# EAGLE board STorM32 NT mpu module v007-mpu6000-panelized (EAGLE 6.5.0)
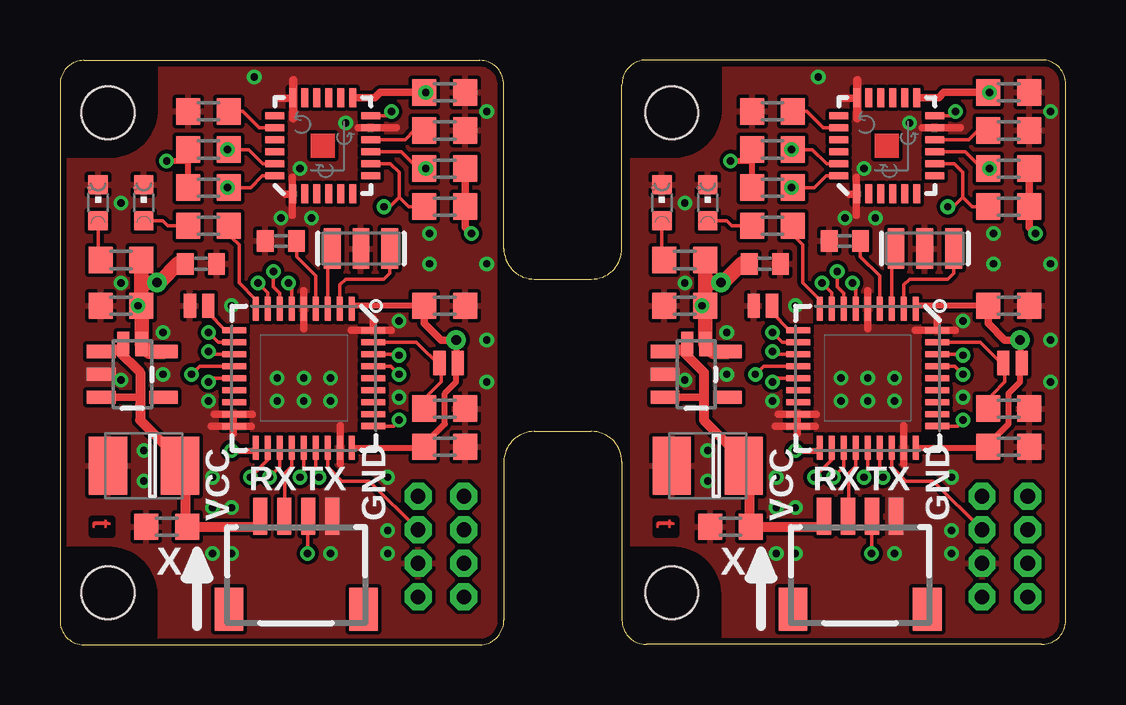
[diagram p0: board, top side]
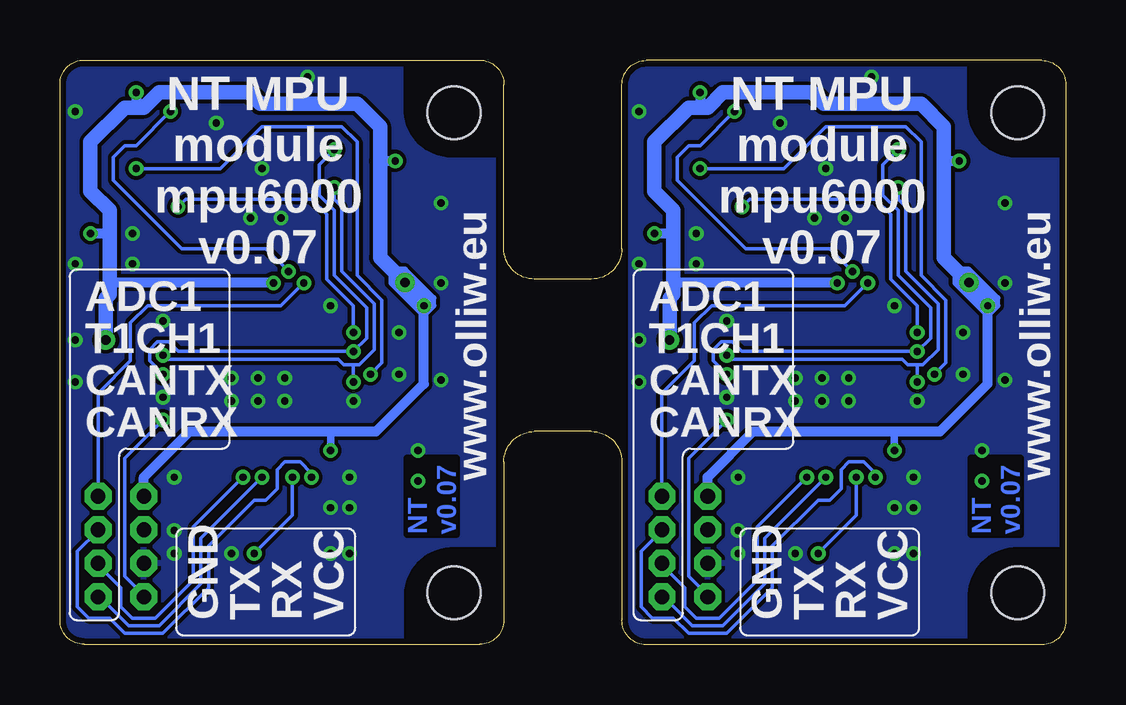
[diagram p1: board, bottom side, seen from below]

Size 41.91 x 24.37 mm. Coordinates in mm from the lower left corner, seen from the top.
Outline: 1,24.35 17.49,24.35 arc-90 18.49,23.34 18.49,16.51 arc90 19.76,15.24 22.15,15.24 arc90 23.42,16.51 23.42,23.34 arc-90 24.42,24.37 40.91,24.37 arc-90 41.91,23.37 41.91,1.02 arc-90 40.91,0.02 24.42,0.02 arc-90 23.42,1.03 23.42,7.62 arc90 22.15,8.89 19.76,8.89 arc90 18.49,7.62 18.49,1.03 arc-90 17.49,0 1,0 arc-90 0,1 0,23.35 arc-90 1,24.35
Copper layers (1*16): Top 0.035mm / dielectric 1.5mm / Bottom 0.035mm
Design rules "Fusion_eagle_rule_v1.1-shapes-supply-changed": minimum track width 6mil, minimum drill 12mil, track to track 6mil, track to pad 6mil, pad to pad 6mil, via to via 6mil, smd to smd 0mil, copper to edge 10mil, drill to drill 10mil, minimum pad ring 10mil, minimum via ring 6mil, stop-mask expansion 2mil, vias tented up to drill 100mil, thermal gap 6mil
Holes 2.2 mm at 2,2.18 2,22.18 25.5,2.18 25.5,22.18

## Footprints (pad centres in the part's own frame; a part is rotated, then mirrored left to right if it is on the bottom)
SMC_B = smd 1.6 x 2.4: + -1.5,0; - 1.5,0
C0603 = smd 1 x 1.1: 1 -0.85,0; 2 0.85,0
C0402 = smd 0.7 x 0.9: 1 -0.65,0; 2 0.65,0
QFN-24 = smd 0.8 x 0.3: 1 -2,1.25; 2 -2,0.75; 3 -2,0.25; 4 -2,-0.25; 5 -2,-0.75; 6 -2,-1.25; 13 2,-1.25; 14 2,-0.75; 15 2,-0.25; 16 2,0.25; 17 2,0.75; 18 2,1.25 | smd 0.3 x 0.8: 7 -1.25,-2; 8 -0.75,-2; 9 -0.25,-2; 10 0.25,-2; 11 0.75,-2; 12 1.25,-2; 19 1.25,2; 20 0.75,2; 21 0.25,2; 22 -0.25,2; 23 -0.75,2; 24 -1.25,2
SOT23-5 = smd 0.55 x 1.2: 1 -0.95,-1.3; 2 0,-1.3; 3 0.95,-1.3; 4 0.95,1.3; 5 -0.95,1.3
4X1_1P27_OCT_BILEX = drill 0.61 pad 1.118 octagon: 1 0,0; 2 0,-1.397; 3 0,-2.794; 4 0,-4.191
CHIPLED_0603 = smd 0.8 x 0.8: A 0,-0.75; C 0,0.75
SM04B-SRSS-TB = smd 0.6 x 1.55: 1 -1.5,2.975; 2 -0.5,2.975; 3 0.5,2.975; 4 1.5,2.975 | smd 1.2 x 1.8: FIT@1 -2.8,-0.9; FIT@2 2.8,-0.9
R0603 = smd 1 x 1.1: 1 -0.85,0; 2 0.85,0
SJ_2S-NO = smd 0.508 x 1.016: 1 -0.381,0; 2 0.381,0
VFQFPN36 = smd 1 x 0.25: 1 -2.9,2; 2 -2.9,1.5; 3 -2.9,1; 4 -2.9,0.5; 5 -2.9,0; 6 -2.9,-0.5; 7 -2.9,-1; 8 -2.9,-1.5; 9 -2.9,-2; 19 2.9,-2; 20 2.9,-1.5; 21 2.9,-1; 22 2.9,-0.5; 23 2.9,0; 24 2.9,0.5; 25 2.9,1; 26 2.9,1.5; 27 2.9,2 | smd 0.25 x 1: 10 -2,-2.9; 11 -1.5,-2.9; 12 -1,-2.9; 13 -0.5,-2.9; 14 0,-2.9; 15 0.5,-2.9; 16 1,-2.9; 17 1.5,-2.9; 18 2,-2.9; 29 1.5,2.9; 30 1,2.9; 31 0.5,2.9; 32 0,2.9; 33 -0.5,2.9; 34 -1,2.9; 35 -1.5,2.9; 36 -2,2.9 | smd 0.27 x 1: 28 2,2.9
RESONATOR-SMD = smd 0.7 x 1.7: 1 -1.2,0; 2 0,0; 3 1.2,0

## Placement (x,y rotation side)
C1  10u/6.3V  [SMC_B]  3.49,7.46 180 top
C2  100n  [C0603]  4.45,4.92 180 top
C3  100n  [C0603]  16.03,23.02 0 top
C4  10u/6.3V  [SMC_B]  26.99,7.46 180 top
C5  2.2n  [C0603]  6.19,22.22 180 top
C6  100n  [C0603]  16.03,21.43 0 top
C7  1u  [C0603]  2.54,14.13 180 top
C8  100n  [C0402]  9.21,16.83 180 top
C9  100n  [C0603]  16.03,8.25 0 top
C10  100n  [C0402]  5.87,15.88 0 top
C11  100n  [C0603]  16.03,14.13 0 top
C12  100n  [C0603]  39.53,21.43 0 top
C13  2.2n  [C0603]  29.69,22.22 180 top
C14  100n  [C0603]  39.53,23.02 0 top
C15  100n  [C0603]  27.94,4.92 180 top
C16  1u  [C0603]  26.04,14.13 180 top
C17  100n  [C0402]  32.7,16.83 180 top
C18  100n  [C0603]  39.53,8.25 0 top
C19  100n  [C0402]  29.37,15.88 0 top
C20  100n  [C0603]  39.53,14.13 0 top
IC1  MPU6000  [QFN-24]  10.95,20.8 90 top
IC2  [SOT23-5]  3.02,11.27 270 top
IC3  MPU6000  [QFN-24]  34.45,20.8 90 top
IC4  [SOT23-5]  26.51,11.27 270 top
JP1  EXT  [4X1_1P27_OCT_BILEX]  16.83,6.19 0 top
JP2  SWD  [4X1_1P27_OCT_BILEX]  14.92,6.19 0 top
JP3  EXT  [4X1_1P27_OCT_BILEX]  40.32,6.19 0 top
JP4  SWD  [4X1_1P27_OCT_BILEX]  38.42,6.19 0 top
LED1  red  [CHIPLED_0603]  1.59,18.41 0 top
LED2  green  [CHIPLED_0603]  3.49,18.41 0 top
LED3  red  [CHIPLED_0603]  25.08,18.41 0 top
LED4  green  [CHIPLED_0603]  26.99,18.41 0 top
NTX  NTX  [SM04B-SRSS-TB]  9.84,2.38 0 top
NTX1  NTX  [SM04B-SRSS-TB]  33.34,2.38 0 top
R1  2.2k  [R0603]  2.54,16.03 180 top
R2  2.2k  [R0603]  6.19,20.64 180 top
R3  2.2k  [R0603]  6.19,19.05 180 top
R4  10k  [R0603]  16.03,19.84 0 top
R5  10k  [R0603]  16.03,18.26 0 top
R6  2.2k  [R0603]  6.19,17.46 180 top
R7  10k  [R0603]  16.03,9.84 180 top
R8  2.2k  [R0603]  29.69,20.64 180 top
R9  2.2k  [R0603]  29.69,19.05 180 top
R10  2.2k  [R0603]  26.04,16.03 180 top
R11  10k  [R0603]  39.53,19.84 0 top
R12  10k  [R0603]  39.53,18.26 0 top
R13  10k  [R0603]  39.53,9.84 180 top
R14  2.2k  [R0603]  29.69,17.46 180 top
SJ1  POWER  [SJ_2S-NO]  3.02,12.54 0 top
SJ2  BOOT0  [SJ_2S-NO]  16.19,11.75 180 top
SJ3  IMU-ID  [SJ_2S-NO]  5.79,14.13 0 top
SJ4  POWER  [SJ_2S-NO]  26.51,12.54 0 top
SJ5  BOOT0  [SJ_2S-NO]  39.69,11.75 180 top
SJ6  IMU-ID  [SJ_2S-NO]  29.29,14.13 0 top
U1  STM32F10XTXU6  [VFQFPN36]  10.16,11.11 270 top
U2  STM32F10XTXU6  [VFQFPN36]  33.66,11.11 270 top
Y1  RESONATORSMD  [RESONATOR-SMD]  12.54,16.51 180 top
Y2  RESONATORSMD  [RESONATOR-SMD]  36.04,16.51 180 top

## Library data of the parts
C1-C20 R1-R14 = rcl
IC1-IC4 SJ1-SJ6 Y1 Y2 = # SparkFun2
JP1-JP4 = # stdlib
LED1-LED4 = led
NTX NTX1 = con-jst2
U1 U2 = # stm32

## Nets
3.3V: C3.1 C7.1 C9.1 C10.1 C11.1 IC1.13 IC2.5 JP2.1 R1.1 R2.2 R3.2 R4.2 R5.2 SJ1.2 SJ2.1 U1.1 U1.6 U1.19 U1.27
3.3V1: C14.1 C16.1 C18.1 C19.1 C20.1 IC3.13 IC4.5 JP4.1 R8.2 R9.2 R10.1 R11.2 R12.2 SJ4.2 SJ5.1 U2.1 U2.6 U2.19 U2.27
5V2: C1.+ C2.1 IC2.1 IC2.3 NTX.1 SJ1.1
5V3: C4.+ C15.1 IC4.1 IC4.3 NTX1.1 SJ4.1
ADC3: JP1.1 U1.8
ADC4: JP3.1 U2.8
CANRX2: JP1.4 U1.23
CANRX3: JP3.4 U2.23
CANTX2: JP1.3 U1.24
CANTX3: JP3.3 U2.24
CS2: IC1.8 R5.1 U1.11
CS3: IC3.8 R12.1 U2.11
GND: C1.- C2.2 C3.2 C5.2 C6.2 C7.2 C8.2 C9.2 C10.2 C11.2 IC1.1 IC1.11 IC1.18 IC2.2 JP2.3 LED1.C LED2.C NTX.4 R7.1 SJ3.1 U1.5 U1.17 U1.18 U1.26 U1.36 Y1.2
GND5: C4.- C12.2 C13.2 C14.2 C15.2 C16.2 C17.2 C18.2 C19.2 C20.2 IC3.1 IC3.11 IC3.18 IC4.2 JP4.3 LED3.C LED4.C NTX1.4 R13.1 SJ6.1 U2.5 U2.17 U2.18 U2.26 U2.36 Y2.2
INT2: IC1.12 U1.7
INT3: IC3.12 U2.7
LED2: R6.1 U1.9
LED3: R14.1 U2.9
N$15: LED1.A R1.2
N$16: C6.1 IC1.10
N$17: C5.1 IC1.20
N$18: C8.1 U1.4
N$19: R7.2 SJ2.2 U1.35
N$21: LED2.A R6.2
N$22: U1.2 Y1.1
N$23: U1.3 Y1.3
N$25: LED3.A R10.2
N$26: C12.1 IC3.10
N$27: C13.1 IC3.20
N$28: C17.1 U2.4
N$29: R13.2 SJ5.2 U2.35
N$30: LED4.A R14.2
N$31: U2.2 Y2.1
N$32: U2.3 Y2.3
RX3: NTX.2 U1.22
RX4: SJ3.2 U1.10
RX5: NTX1.2 U2.22
RX6: SJ6.2 U2.10
SCL2: IC1.23 R2.1 U1.12 U1.33
SCL3: IC3.23 R8.1 U2.12 U2.33
SDA2: IC1.24 R3.1 U1.14 U1.34
SDA3: IC3.24 R9.1 U2.14 U2.34
SDO2: IC1.9 R4.1 U1.13
SDO3: IC3.9 R11.1 U2.13
SWCLK1: JP2.4 U1.28
SWCLK2: JP4.4 U2.28
SWDIO2: JP2.2 U1.25
SWDIO3: JP4.2 U2.25
T1CH2: JP1.2 U1.20
T1CH3: JP3.2 U2.20
TX2: NTX.3 U1.21
TX3: NTX1.3 U2.21

## Tracks (layer width: path | path; a pad name or v marks a point on that pad's centre or on a via)
3.3V  (via drill 0.3, 0.4 pad 0.81)
  Top 0.152: 12.2,14.13 U1.1 | 15.34,8.21 C9.1 | 3.4,14.44 C7.1 | 16.51,11.34 SJ2.1 16.51,12 | 8.04,8.1 U1.19 | U1.6 9.66,14.95 v9.53,15.08 | 3.4,15.1 3.39,15.24 | C3.1 v15.24,23.02
  Top 0.254: C11.1 12.2,14.13 | U1.27 15.34,8.21 15.34,8.52 16.03,9.21 16.03,10.48 16.51,10.95 16.51,11.34 16.51,12 v16.51,12.7 | R3.2 R2.2 5.24,20.32 5.24,20.16 v4.45,20.16 | v7.14,8.1 8.04,8.1
  Top 0.305: IC1.13 13.11,22.8 13.33,23.02 C3.1 | C11.1 15.18,13.39 15.87,12.7 v16.51,12.7 | v17.14,17.14 16.88,17.41 R5.2 R4.2
  Top 0.406: C7.1 v3.25,14.13
  Top 0.61: 3.4,14.44 SJ1.2 3.72,12.22 IC2.5 | C7.1 3.39,15.24 R1.1 | 3.4,15.1 v4.04,15.1 4.13,15.08 4.94,15.89 C10.1
  Bottom 0.254: 4.6,15.08 3.33,13.81 3.18,13.81 2.86,14.13 2.86,14.45 4.05,15.64 4.6,15.64 4.6,15.08 | 4.6,15.08 4.52,15.16 4.1,15.16 v4.04,15.1 v4.04,15.09 | 2.94,14.29 3.02,14.29 3.89,15.16 3.97,15.16 v4.04,15.09 | v4.04,15.09 4.21,14.92 3.18,13.89 3.18,14.29 3.25,14.37
  Bottom 0.305: v7.14,8.1 7.14,8.89
  Bottom 0.406: v4.04,15.1 3.25,14.31 3.25,10.87 5.24,8.89 7.14,8.89 13.02,8.89 14.92,6.98 JP2.1 | 5.08,20.16 v4.45,20.16 | v15.24,23.02 15.24,22.38 | v17.14,17.14 16.35,17.14 | v9.53,15.08 16.35,15.08
  Bottom 0.61: v4.04,15.1 5.08,16.14 5.08,20.16 5.08,21.59 6.03,22.54 10.08,22.54 10.56,23.02 14.29,23.02 14.92,22.38 15.24,22.38 15.72,22.38 17.14,20.96 17.14,18.89 16.35,18.1 16.35,17.14 16.35,15.08 16.35,14.61 16.51,14.45 v16.51,12.7
  pour Bottom (isolate 0.254, rank 2): 1.11,13.18 1.11,12.38 1.75,12.38 1.75,13.18
3.3V1  (via drill 0.3, 0.4 pad 0.81)
  Top 0.152: 35.7,14.13 U2.1 | 38.84,8.21 C18.1 | 26.89,14.44 C16.1 | 40,11.34 SJ5.1 40,12 | 31.54,8.1 U2.19 | U2.6 33.16,14.95 v33.02,15.08 | 26.9,15.1 26.89,15.24 | C14.1 v38.73,23.02
  Top 0.254: C20.1 35.7,14.13 | U2.27 38.84,8.21 38.84,8.52 39.53,9.21 39.53,10.48 40,10.95 40,11.34 40,12 v40,12.7 | R9.2 R8.2 28.73,20.32 28.73,20.16 v27.94,20.16 | v30.64,8.1 31.54,8.1
  Top 0.305: IC3.13 36.61,22.8 36.83,23.02 C14.1 | C20.1 38.68,13.39 39.37,12.7 v40,12.7 | v40.64,17.14 40.38,17.41 R12.2 R11.2
  Top 0.406: C16.1 v26.75,14.13
  Top 0.61: 26.89,14.44 SJ4.2 27.21,12.22 IC4.5 | C16.1 26.89,15.24 R10.1 | 26.9,15.1 v27.54,15.1 27.62,15.08 28.43,15.89 C19.1
  Bottom 0.254: 28.1,15.08 26.83,13.81 26.67,13.81 26.35,14.13 26.35,14.45 27.54,15.64 28.1,15.64 28.1,15.08 | 28.1,15.08 28.02,15.16 27.6,15.16 v27.54,15.1 v27.54,15.09 | 26.43,14.29 26.51,14.29 27.38,15.16 27.46,15.16 v27.54,15.09 | v27.54,15.09 27.7,14.92 26.67,13.89 26.67,14.29 26.75,14.37
  Bottom 0.305: v30.64,8.1 30.64,8.89
  Bottom 0.406: v27.54,15.1 26.75,14.31 26.75,10.87 28.73,8.89 30.64,8.89 36.51,8.89 38.42,6.98 JP4.1 | 28.57,20.16 v27.94,20.16 | v38.73,23.02 38.73,22.38 | v40.64,17.14 39.85,17.14 | v33.02,15.08 39.85,15.08
  Bottom 0.61: v27.54,15.1 28.57,16.14 28.57,20.16 28.57,21.59 29.53,22.54 33.58,22.54 34.05,23.02 37.78,23.02 38.42,22.38 38.73,22.38 39.21,22.38 40.64,20.96 40.64,18.89 39.85,18.1 39.85,17.14 39.85,15.08 39.85,14.61 40,14.45 v40,12.7
  pour Bottom (isolate 0.254, rank 2): 24.61,13.18 24.61,12.38 25.24,12.38 25.24,13.18
5V2
  Top 0.152: C2.1 5.24,4.76 | 5.24,7.85 C1.+ 4.92,7.37 4.92,7.78 | 3.33,10.32 3.33,10 | 2.38,12.3 2.54,12.45 SJ1.1 | 8.25,4.92 8.41,4.92 | 8.25,5.11 NTX.1
  Top 0.305: IC2.3 3.33,10.32 | 8.41,4.92 8.25,5.11
  Top 0.406: 5.24,4.76 5.24,7.85 | IC2.1 2.38,12.3 3.33,11.35 3.33,10 3.33,9.37 4.92,7.78 | C2.1 8.25,4.92
5V3
  Top 0.152: C15.1 28.73,4.76 | 28.73,7.85 C4.+ 28.42,7.37 28.42,7.78 | 26.83,10.32 26.83,10 | 25.88,12.3 26.04,12.45 SJ4.1 | 31.75,4.92 31.91,4.92 | 31.75,5.11 NTX1.1
  Top 0.305: IC4.3 26.83,10.32 | 31.91,4.92 31.75,5.11
  Top 0.406: 28.73,4.76 28.73,7.85 | IC4.1 25.88,12.3 26.83,11.35 26.83,10 26.83,9.37 28.42,7.78 | C15.1 31.75,4.92
ADC3  (via drill 0.3)
  Top 0.152: U1.8 8.66,14.68 v8.25,15.08
  Bottom 0.152: v8.25,15.08 9.21,14.13 14.76,14.13 15.48,13.41 15.48,11.83 16.83,10.48 JP1.1
ADC4  (via drill 0.3)
  Top 0.152: U2.8 32.16,14.68 v31.75,15.08
  Bottom 0.152: v31.75,15.08 32.7,14.13 38.26,14.13 38.97,13.41 38.97,11.83 40.32,10.48 JP3.1
CANRX2  (via drill 0.3)
  Top 0.152: v10,6.98 10.16,7.14 U1.23
  Bottom 0.152: v10,6.98 12.54,4.45 12.54,2.54 14.29,0.79 15.56,0.79 16.51,1.75 16.73,1.75 JP1.4
CANRX3  (via drill 0.3)
  Top 0.152: v33.5,6.98 33.66,7.14 U2.23
  Bottom 0.152: v33.5,6.98 36.04,4.45 36.04,2.54 37.78,0.79 39.05,0.79 40,1.75 40.23,1.75 JP3.4
CANTX2  (via drill 0.3)
  Top 0.152: U1.24 10.66,7.12 v10.79,6.98
  Bottom 0.152: v10.79,6.98 12.86,4.92 12.86,2.7 14.45,1.11 15.4,1.11 15.87,1.59 15.87,2.38 16.73,3.24 JP1.3
CANTX3  (via drill 0.3)
  Top 0.152: U2.24 34.16,7.12 v34.29,6.98
  Bottom 0.152: v34.29,6.98 36.35,4.92 36.35,2.7 37.94,1.11 38.89,1.11 39.37,1.59 39.37,2.38 40.23,3.24 JP3.3
CS2  (via drill 0.3)
  Top 0.152: U1.11 6.6,12.61 v6.19,13.02 | IC1.8 13.77,20.05 14.13,19.68 14.13,18.65 | R5.1 14.53,18.26 14.13,18.65 | v13.49,18.26 13.73,18.26 14.13,18.65
  Bottom 0.152: v6.19,13.02 6.19,14.13 7.3,15.24 7.3,17.94 7.94,18.57 13.18,18.57 v13.49,18.26
CS3  (via drill 0.3)
  Top 0.152: U2.11 30.09,12.61 v29.69,13.02 | IC3.8 37.26,20.05 37.62,19.68 37.62,18.65 | R12.1 38.02,18.26 37.62,18.65 | v36.99,18.26 37.23,18.26 37.62,18.65
  Bottom 0.152: v29.69,13.02 29.69,14.13 30.8,15.24 30.8,17.94 31.43,18.57 36.67,18.57 v36.99,18.26
GND  (via drill 0.3 pad 0.61)
  Top 0.152: U1.17 7.26,9.48 7.22,9.45
  Top 0.305: 10.16,14.76 10.16,13.18 | 13.81,13.11 12.14,13.11 | 6.43,9.6 8.02,9.6 | 6.31,9.12 7.98,9.12 | 11.67,9.13 11.67,7.54 | 9.68,19.49 9.68,18.77 | 9.68,18.77 9.68,17.9 | 12.42,21.55 14.01,21.55 | 9.41,18.77 9.68,18.77 | 9.09,22.78 9.68,22.78 | 13.06,13.18 13.06,13.61 | 7.22,8.81 7.22,9.45
  Top 0.356: 9.72,21.95 9.72,23.54
  other vias: 2.54,15.08 9.05,11.11 11.27,11.11 10.16,11.11 9.05,10.16 10.16,10.16 11.27,10.16 7.14,14.13 10,19.84 11.91,21.75 13.65,6.98 6.35,6.98 3.49,8.1 3.49,6.83 2.54,18.41 13.65,3.81 14.13,10.32 11.27,3.81 7.14,3.81 6.35,3.81 4.29,11.27 15.4,17.14 15.4,15.88 17.78,15.88 7.14,5.71 6.35,5.71 6.19,10.16 13.65,4.76 17.78,12.7 17.78,10.95 4.29,13.02 2.54,11.03 17.78,22.22 8.1,23.65 9.21,17.78 10.48,17.78 14.13,13.49
  pour Bottom (isolate 0.152): 0.33,23.35 arc-90 1,24.02 17.49,24.02 arc-90 18.16,23.35 18.16,1 arc-90 17.49,0.33 1,0.33 arc-90 0.33,1
  pour Top (isolate 0.152): 0.33,23.35 arc-90 1,24.02 17.49,24.02 arc-90 18.16,23.35 18.16,1 arc-90 17.49,0.33 1,0.33 arc-90 0.33,1
  cutout Bottom: 0.27,20.31 2.12,20.31 arc90 4.08,22.37 4.08,24.12 1.02,24.12 arc90 0.27,23.37
  cutout Top: 0.27,20.31 2.12,20.31 arc90 4.08,22.37 4.08,24.12 1.02,24.12 arc90 0.27,23.37
  cutout Bottom: 4.06,0.25 4.06,2.1 arc90 2,4.06 0.25,4.06 0.25,1 arc90 1,0.25
  cutout Top: 4.06,0.25 4.06,2.1 arc90 2,4.06 0.25,4.06 0.25,1 arc90 1,0.25
  pour Top (no thermals): 10.95,6.35 11.91,6.35 11.91,4.13 10.95,4.13
  pour Top (no thermals): 0.95,11.75 2.54,11.75 2.54,10.87 0.95,10.87
GND5  (via drill 0.3 pad 0.61)
  Top 0.152: U2.17 30.75,9.48 30.72,9.45
  Top 0.305: 33.66,14.76 33.66,13.18 | 37.31,13.11 35.64,13.11 | 29.92,9.6 31.51,9.6 | 29.81,9.12 31.47,9.12 | 35.16,9.13 35.16,7.54 | 33.18,19.49 33.18,18.77 | 33.18,18.77 33.18,17.9 | 35.92,21.55 37.5,21.55 | 32.9,18.77 33.18,18.77 | 32.58,22.78 33.18,22.78 | 36.55,13.18 36.55,13.61 | 30.72,8.81 30.72,9.45
  Top 0.356: 33.22,21.95 33.22,23.54
  other vias: 26.04,15.08 32.54,11.11 34.77,11.11 33.66,11.11 32.54,10.16 33.66,10.16 34.77,10.16 30.64,14.13 33.5,19.84 35.4,21.75 37.15,6.98 29.85,6.98 26.99,8.1 26.99,6.83 26.04,18.41 37.15,3.81 37.62,10.32 34.77,3.81 30.64,3.81 29.85,3.81 27.78,11.27 38.89,17.14 38.89,15.88 41.27,15.88 30.64,5.71 29.85,5.71 29.69,10.16 37.15,4.76 41.27,12.7 41.27,10.95 27.78,13.02 26.04,11.03 41.27,22.22 31.59,23.65 32.7,17.78 33.97,17.78 37.62,13.49
  pour Bottom (isolate 0.152): 23.82,23.35 arc-90 24.5,24.02 40.99,24.02 arc-90 41.66,23.35 41.66,1 arc-90 40.99,0.33 24.5,0.33 arc-90 23.82,1
  pour Top (isolate 0.152): 23.82,23.35 arc-90 24.5,24.02 40.99,24.02 arc-90 41.66,23.35 41.66,1 arc-90 40.99,0.33 24.5,0.33 arc-90 23.82,1
  cutout Bottom: 23.76,20.31 25.61,20.31 arc90 27.57,22.37 27.57,24.12 24.51,24.12 arc90 23.76,23.37
  cutout Top: 23.76,20.31 25.61,20.31 arc90 27.57,22.37 27.57,24.12 24.51,24.12 arc90 23.76,23.37
  cutout Bottom: 27.55,0.25 27.55,2.1 arc90 25.5,4.06 23.75,4.06 23.75,1 arc90 24.5,0.25
  cutout Top: 27.55,0.25 27.55,2.1 arc90 25.5,4.06 23.75,4.06 23.75,1 arc90 24.5,0.25
  pour Top (no thermals): 34.45,6.35 35.4,6.35 35.4,4.13 34.45,4.13
  pour Top (no thermals): 24.45,11.75 26.04,11.75 26.04,10.87 24.45,10.87
INT2  (via drill 0.3)
  Top 0.152: U1.7 9.16,14.65 8.89,14.92 v8.89,15.56 | IC1.12 13.67,22.05 v13.81,22.22
  Bottom 0.152: v13.81,22.22 15.24,20.8 15.72,20.8 16.19,20.32 16.19,19.37 13.33,16.51 9.84,16.51 v8.89,15.56
INT3  (via drill 0.3)
  Top 0.152: U2.7 32.66,14.65 32.38,14.92 v32.38,15.56 | IC3.12 37.17,22.05 v37.31,22.22
  Bottom 0.152: v37.31,22.22 38.73,20.8 39.21,20.8 39.69,20.32 39.69,19.37 36.83,16.51 33.34,16.51 v32.38,15.56
LED2
  Top 0.152: U1.9 8.16,14.38 7.46,15.08 7.46,16.67 7.14,16.99 7.14,17.36 R6.1
LED3
  Top 0.152: U2.9 31.66,14.38 30.96,15.08 30.96,16.67 30.64,16.99 30.64,17.36 R14.1
N$15
  Top 0.152: LED1.A 1.59,16.3 R1.2
N$16
  Top 0.152: IC1.10 14.38,21.05 14.76,21.43 C6.1
N$17
  Top 0.152: IC1.20 8.3,21.55 7.62,22.22 C5.1
N$18
  Top 0.152: U1.4 10.66,15.38 9.86,16.18 C8.1
N$19
  Top 0.152: U1.35 14.85,12.61 15.87,11.59 | 15.87,11.59 SJ2.2 | R7.2 15.34,10.42 15.87,10.95 15.87,11.59
N$21
  Top 0.152: 3.54,17.94 LED2.A 4.29,17.66 4.49,17.46 R6.2
N$22
  Top 0.152: U1.2 11.66,14.99 11.91,15.24 13.49,15.24 13.74,15.49 Y1.1
N$23
  Top 0.152: U1.3 11.16,15.99 11.34,16.28 Y1.3
N$25
  Top 0.152: LED3.A 25.08,16.3 R10.2
N$26
  Top 0.152: IC3.10 37.87,21.05 38.26,21.43 C12.1
N$27
  Top 0.152: IC3.20 31.79,21.55 31.11,22.22 C13.1
N$28
  Top 0.152: U2.4 34.16,15.38 33.35,16.18 C17.1
N$29
  Top 0.152: U2.35 38.35,12.61 39.37,11.59 | 39.37,11.59 SJ5.2 | R13.2 38.84,10.42 39.37,10.95 39.37,11.59
N$30
  Top 0.152: 27.03,17.94 LED4.A 27.78,17.66 27.98,17.46 R14.2
N$31
  Top 0.152: U2.2 35.16,14.99 35.4,15.24 36.99,15.24 37.24,15.49 Y2.1
N$32
  Top 0.152: U2.3 34.66,15.99 34.84,16.28 Y2.3
RX3
  Top 0.152: U1.22 9.66,7.44 9.37,7.14 9.37,5.22 NTX.2
RX4
  Top 0.152: U1.10 6.89,13.11 6.17,13.83 SJ3.2
RX5
  Top 0.152: U2.22 33.16,7.44 32.86,7.14 32.86,5.22 NTX1.2
RX6
  Top 0.152: U2.10 30.39,13.11 29.67,13.83 SJ6.2
SCL2  (via drill 0.3)
  Top 0.152: U1.33 13.79,11.61 v14.13,11.27 | U1.12 6.3,12.11 v6.19,12.22 | v6.98,20.64 R2.1 7.86,20.64 8.45,20.05 IC1.23
  Bottom 0.152: v14.13,11.27 14.68,11.83 14.68,12.3 14.37,12.62 13.89,12.62 13.49,12.22 v6.19,12.22 5.64,12.78 5.64,14.05 6.98,15.4 6.98,18.1 7.62,18.73 7.62,20 v6.98,20.64
SCL3  (via drill 0.3)
  Top 0.152: U2.33 37.28,11.61 v37.62,11.27 | U2.12 29.8,12.11 v29.69,12.22 | v30.48,20.64 R8.1 31.35,20.64 31.94,20.05 IC3.23
  Bottom 0.152: v37.62,11.27 38.18,11.83 38.18,12.3 37.86,12.62 37.39,12.62 36.99,12.22 v29.69,12.22 29.13,12.78 29.13,14.05 30.48,15.4 30.48,18.1 31.11,18.73 31.11,20 v30.48,20.64
SDA2  (via drill 0.3)
  Top 0.152: IC1.24 8.43,19.55 7.94,19.05 R3.1 v6.98,19.05 | U1.34 14.08,12.11 v14.13,12.07 | U1.14 6.35,11.11 v6.19,10.95
  Bottom 0.152: v14.13,12.07 13.97,11.91 6.83,11.91 6.59,11.67 6.19,11.67 | 6.19,11.67 5.95,11.67 5.32,12.3 5.32,14.21 6.67,15.56 6.67,18.26 6.98,18.57 v6.98,19.05 | v6.19,10.95 6.19,11.67
SDA3  (via drill 0.3)
  Top 0.152: IC3.24 31.93,19.55 31.43,19.05 R9.1 v30.48,19.05 | U2.34 37.58,12.11 v37.62,12.07 | U2.14 29.85,11.11 v29.69,10.95
  Bottom 0.152: v37.62,12.07 37.46,11.91 30.32,11.91 30.08,11.67 29.69,11.67 | 29.69,11.67 29.45,11.67 28.81,12.3 28.81,14.21 30.16,15.56 30.16,18.26 30.48,18.57 v30.48,19.05 | v29.69,10.95 29.69,11.67
SDO2  (via drill 0.3)
  Top 0.152: IC1.9 14.22,20.55 14.92,19.84 R4.1 15.24,19.9 v15.24,19.84 | U1.13 5.82,11.61 v5.48,11.27
  Bottom 0.152: v5.48,11.27 5,11.75 5,14.37 6.03,15.4 6.03,20.96 6.67,21.59 10,21.59 11.75,19.84 v15.24,19.84
SDO3  (via drill 0.3)
  Top 0.152: IC3.9 37.71,20.55 38.42,19.84 R11.1 38.73,19.9 v38.73,19.84 | U2.13 29.31,11.61 v28.97,11.27
  Bottom 0.152: v28.97,11.27 28.5,11.75 28.5,14.37 29.53,15.4 29.53,20.96 30.16,21.59 33.5,21.59 35.24,19.84 v38.73,19.84
SWCLK1  (via drill 0.3)
  Top 0.152: U1.28 13.91,9.11 v14.13,9.37
  Bottom 0.152: JP2.4 14.92,2.06 15.72,2.86 15.72,7.78 v14.13,9.37
SWCLK2  (via drill 0.3)
  Top 0.152: U2.28 37.4,9.11 v37.62,9.37
  Bottom 0.152: JP4.4 38.42,2.06 39.21,2.86 39.21,7.78 v37.62,9.37
SWDIO2
  Top 0.152: U1.25 11.16,7.41 11.75,6.83 12.89,6.83 JP2.2
SWDIO3
  Top 0.152: U2.25 34.66,7.41 35.24,6.83 36.39,6.83 JP4.2
T1CH2  (via drill 0.3)
  Top 0.152: v7.94,6.98 8.66,7.71 U1.20
  Bottom 0.152: JP1.2 16.83,4.76 17.7,3.89 17.7,1.59 17.22,1.11 16.35,1.11 15.72,0.48 14.13,0.48 12.22,2.38 12.22,4.13 10.32,6.03 9.84,6.03 9.37,6.51 9.37,7.3 9.05,7.62 8.41,7.62 7.94,7.14 v7.94,6.98
T1CH3  (via drill 0.3)
  Top 0.152: v31.43,6.98 32.16,7.71 U2.20
  Bottom 0.152: JP3.2 40.32,4.76 41.2,3.89 41.2,1.59 40.72,1.11 39.85,1.11 39.21,0.48 37.62,0.48 35.72,2.38 35.72,4.13 33.81,6.03 33.34,6.03 32.86,6.51 32.86,7.3 32.54,7.62 31.91,7.62 31.43,7.14 v31.43,6.98
TX2  (via drill 0.3)
  Top 0.152: U1.21 9.16,7.41 v8.73,6.98 | v10.32,3.81 10.32,5.17 NTX.3
  Bottom 0.152: v8.73,6.98 8.73,5.4 v10.32,3.81
TX3  (via drill 0.3)
  Top 0.152: U2.21 32.66,7.41 v32.23,6.98 | v33.81,3.81 33.81,5.17 NTX1.3
  Bottom 0.152: v32.23,6.98 32.23,5.4 v33.81,3.81

## Text on the board
Top: t | t
Bottom: NT / v0.07 | NT / v0.07
tNames: RX | TX | RX | TX | VCC | GND | VCC | GND | X | X
bNames: www.olliw.eu | www.olliw.eu | NT MPU / module / mpu6000 / v0.07 | NT MPU / module / mpu6000 / v0.07 | ADC1 | ADC1 | T1CH1 | T1CH1 | CANTX | CANTX | CANRX | CANRX | VCC | RX | TX | GND | VCC | RX | TX | GND